# Altium PCB Medusa-AI-ESP.PcbDoc (part 2 of 2)
Units mil, origin at the board's own origin, x right, y up, seen from the top; angles counter-clockwise.
Board outline 7750 x 7750 mil, 4 copper layers (Top Layer, Layer 1, Layer 2, Bottom Layer), stack 23.756 mil thick; 124 components, 93 nets, 550 pads, 211 vias.
Unrouted connection lines stored in the file: 1.
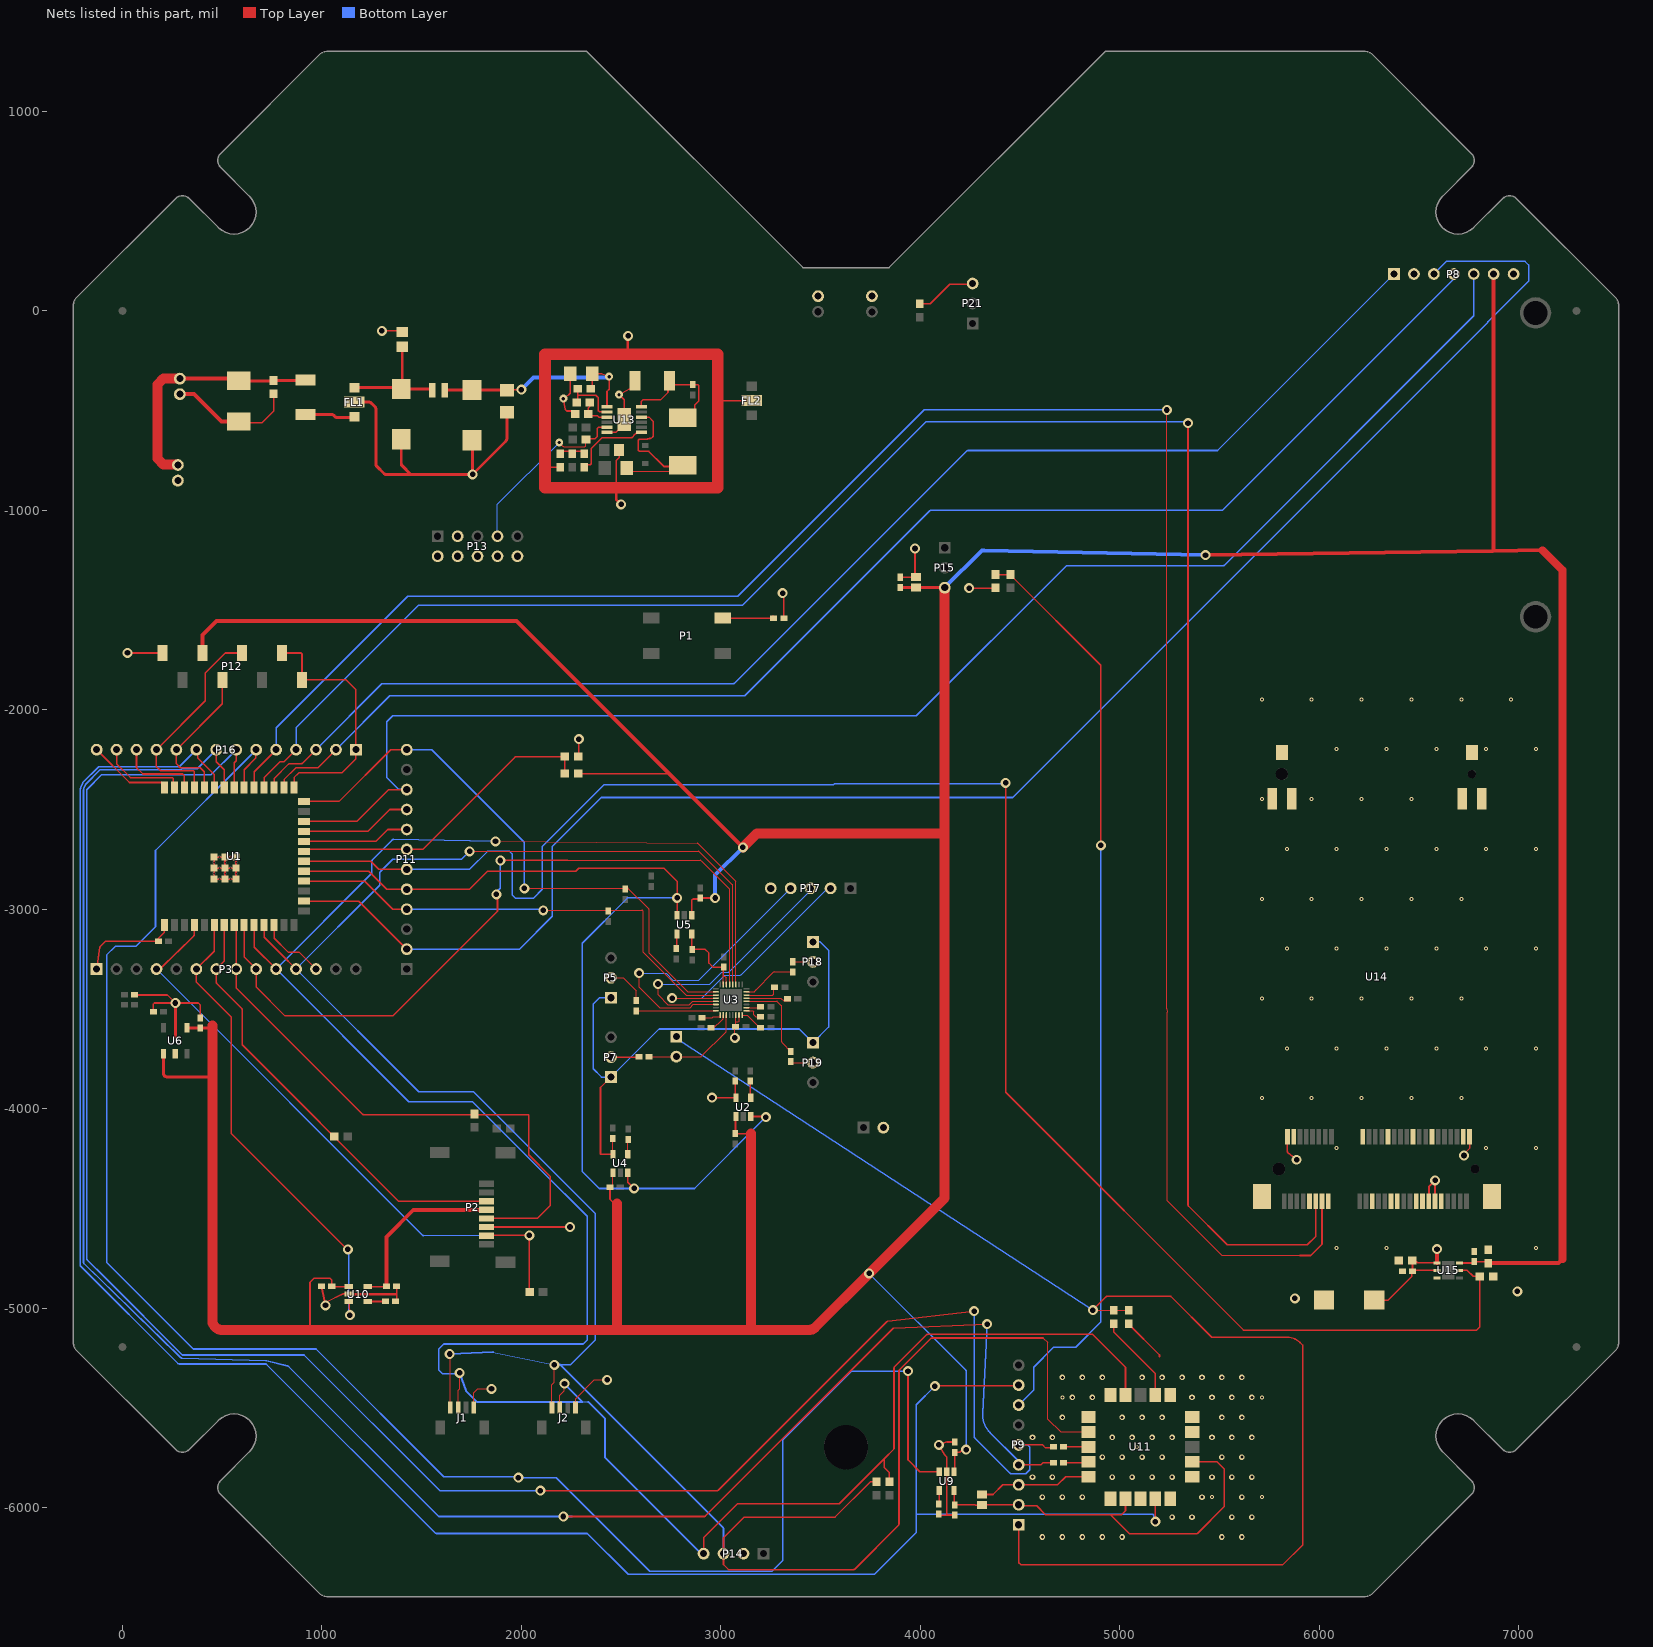
[diagram p4: the nets of this part, all layers, seen from the top]

## Via types
v1: diameter 50, hole 28, Top Layer to Bottom Layer, 64 vias
v2: diameter 28, hole 15, Top Layer to Bottom Layer, tented both sides, 61 vias
v3: diameter 20, hole 10, Top Layer to Bottom Layer, tented both sides, 59 vias
v4: diameter 50, hole 28, Top Layer to Bottom Layer, tented both sides, 16 vias
v5: diameter 40, hole 16, Top Layer to Bottom Layer, tented both sides, 5 vias
v6: diameter 19.68, hole 7.87, Top Layer to Bottom Layer, 4 vias
v7: diameter 38, hole 16, Top Layer to Bottom Layer, tented both sides, 2 vias

## Nets (pads, with @x,y where several pads share a name; then routed paths per layer and width w, separated by ;. In a path a pad name is that pad's centre, name@x,y a point inside that pad or via, vN(x,y) a via of type N, cw(c..) or ccw(c..) an arc to the next point about the centre after c; other vN are vias at no path point) (continued)
DGND: C1.2 C2.1 C3.2 C21.1 C22.2 C25.2 C26.2 C27.2 C28.2 C29.1 C30.1 C31.1 C34.1 C35.2 C38.1 C39.1 C40.2 C41.2 C42.1 C43.1 C44.1 C46.1 C47.2 C48.1 C49.2 C50.2 D2.2 D3.A FL1.2_4 FL2.2_4 J1.1 J2.1 P2.6 P3.1 P4.2 P6.2 P8.7 P9.3 P12.1 P13.2 P13.3 P13.4 P13.6 P13.8 P13.10 P14.2 P16.14 P21.3 P24.2 P25.2 P33.2 R2.1 R4.1 R7.1 R14.1 R16.2 R20.2 R22.1 U1.1 U1.40 U1.41_1 U1.41_2 U1.41_3 U1.41_4 U1.41_5 U1.41_6 U1.41_7 U1.41_8 U1.41_9 U6.2 U9.2 U10.2 U11.1 U11.4 U11.5 U11.6 U11.10 U11.11 U11.15 U11.16 U11.20 U13.6 U13.13 U14.4 U14.9 U14.15 U14.18 U14.21 U14.26 U14.27 U14.29 U14.34 U14.35 U14.37 U14.40 U14.43 U14.50 U14.53 U14.54 U14.S1_1 U14.S1_2 U14.S1_3 U14.S2_1 U14.S2_2 U14.S2_3 U15.3 | length 9985.4
  Top Layer w6: J1.1@1761.5,-5498.94 1761.5,-5423.5 1780,-5405 v1(1850,-5405) ; J2.1@2271.26,-5498.94 2271.26,-5453.74 2365,-5360 v1(2430,-5360)
  Top Layer w8: P3.1@-130,-3300 -113.57,-3190.78 ; P16.14@-130,-2200 34.47,-2364.47 196.28,-2364.47 196.28,-2365 205,-2373.72 205,-2385 U1.40@210,-2390 ; -113.56,-3190.75 cw(c-105.65,-3191.97) -111.32,-3186.32 -87.34,-3162.34 cw(c-81.69,-3168) -81.69,-3160 165.69,-3160 C1.2@179.41,-3160 179.41,-3146.35 207.69,-3118.08 ccw(c202,-3112.45) 210,-3112.45 U1.1@210,-3078.98 ; v1(25,-1715) P12.1@200,-1715 ; C35.2@60.59,-3430 225,-3430 v1(265,-3470) ; C21.1@154.41,-3515 154.41,-3475.59 160,-3470 v1(265,-3470) ; C22.2@390,-3544.41 390,-3479.69 380.31,-3470 v1(265,-3470) ; U1.41_3@510,-2738.43 486.38,-2738.43 U1.41_9@458.82,-2738.43 458.82,-2765.98 U1.41_8@458.82,-2793.54 ; D2.2@555,-560 700,-560 757.44,-502.56 C42.1@757.44,-416.1 ; C27.2@997.72,-4891.1 999.92,-4900.88 ccw(c1007.92,-4900.88) 1000.07,-4902.45 v1(1017.44,-4986.1) v1@1022.57,-4971.42 ; v1@1022.59,-4971.39 cw(c1030.13,-4974.06) 1026.64,-4966.86 1099.99,-4931.52 cw(c1119.43,-4971.73) 1116.52,-4927.16 U10.2@1134.17,-4929.57 ; v1(1300,-100) 1397.2,-100 C43.1@1402.44,-105.24 ; 1368.62,-4929.57 1373.31,-4924.88 ; C30.1@1368.9,-4966.1 1371.55,-4963.45 ccw(c1365.9,-4957.79) 1373.9,-4957.79 1373.9,-4943.68 ; 1373.9,-4929.57 1373.9,-4943.68 ; C28.2@1373.9,-4891.1 1373.9,-4943.68 ; C41.2@1752.44,-648.62 C41.2@1755,-651.18 ; P2.6@1825.51,-4593.5 v1(2243.5,-4593.5) ; 2097.91,-785 2099.45,-783.46 2117.91,-783.46 R14.1@2195,-783.46 ; C39.1@2244.88,-320 2244.88,-412.67 2239.23,-418.32 cw(c2233.59,-412.65) 2238.34,-419.09 v5(2210,-440) 2219.44,-492.44 ccw(c2227.31,-491) 2221.63,-496.63 2226.95,-501.95 2253.29,-501.95 R7.1@2268.98,-517.64 ; R2.1@2285,-2235 2287.64,-2219.31 v1(2287.64,-2146.69) ; U13.6@2429,-609 2474.5,-609 2515,-568.5 U13.13@2515,-545 2515,-445 v5(2490,-420) D3.A@2541.66,-391.59 ; 2475,-865.88 2475,-750 2489.84,-735.16 C46.1@2489.84,-697.64 C46.1@2475,-712.48 ; 2530,-222.68 2532.5,-220.18 ; v1@2532.5,-127.5 v1(2535,-125) ; 2964.06,-445 2969.06,-450 2984.06,-450 FL2.2_4@3155,-450 ; v1(3310,-1415) 3315.59,-1420.59 R20.2@3315.59,-1540 ; C3.2@3898.31,-1335.51 3977.4,-1335.51 C2.1@3978.31,-1334.6 3973.31,-1329.6 v1(3973.31,-1191.1) ; C38.1@3997.44,35.83 4050.24,35.83 4148.31,133.9 P21.3@4268.31,133.9 ; C29.1@4092.44,-6033.07 4097.44,-6038.07 C26.2@4172.44,-6038.07 4170.47,-6036.1 4137.13,-6036.1 4132.44,-6031.42 U9.2@4132.44,-5820.24 4132.44,-5746.25 4124.38,-5738.18 ; 4124.35,-5738.16 cw(c4130.03,-5732.53) 4123.13,-5736.57 v4(4093.31,-5686.1) 4133.62,-5671.1 4171.65,-5671.1 C25.2@4172.44,-5671.89 ; v1(4245,-1390) 4375.59,-1390 R4.1@4376.69,-1388.9 R4.1@4371.69,-1383.9 ; C31.1@4308.31,-5934.6 4364.81,-5934.6 4413.31,-5886.1 P9.3@4493.31,-5886.1 4688.31,-5886.1 4728.9,-5845.51 U11.15@4843.62,-5845.51 ; R22.1@5045,-5078.46 5045,-5080.43 5199.57,-5235 5199.57,-5244.57 ; U14.S1_2@5744.39,-2426.48 U14.S1_2@5764.02,-2446.1 ; C48.1@6398.98,-4761.1 6400.95,-4761.1 C48.1@6416.85,-4777.01 ; C49.2@6416.85,-4816.1 6417.66,-4816.1 C49.2@6427.44,-4825.88 ; U14.35@6486.46,-4463.82 U14.35@6489.45,-4466.81 ; U14.S2_3@6815.2,-2446.1 6827.44,-2433.86 U14.S2_3@6822.44,-2428.86 ; C34.1@6839.57,-4715.51 C34.1@6847.44,-4707.64 ; U14.54@6866.38,-4457.91 U14.54@6866.38,-4440.2 ; R16.2@6872.43,-4840.69 R16.2@6872.85,-4841.1 ; U1.41_8@458.82,-2793.54 486.38,-2793.54 U1.41_1@513.94,-2793.54 ; U1.41_8@458.82,-2793.54 458.82,-2821.1 U1.41_7@458.82,-2848.66 486.38,-2848.66 U1.41_2@513.94,-2848.66 ; U1.41_2@513.94,-2848.66 513.94,-2821.1 U1.41_1@513.94,-2793.54 ; U1.41_2@513.94,-2848.66 541.5,-2848.66 U1.41_4@569.06,-2848.66 569.06,-2821.1 U1.41_5@569.06,-2793.54 ; U1.41_1@513.94,-2793.54 541.5,-2793.54 U1.41_5@569.06,-2793.54 ; U1.41_1@513.94,-2793.54 513.94,-2765.98 U1.41_3@513.94,-2738.43 541.5,-2738.43 U1.41_6@569.06,-2738.43 569.06,-2765.98 U1.41_5@569.06,-2793.54
  Top Layer w12: U10.2@1139.17,-4929.57 1368.62,-4929.57 ; 2475,-865.88 2475,-886.61 2475,-945 v1(2500,-970) ; 2532.5,-220.18 2532.5,-217.32 v1@2532.5,-127.5
  Top Layer w15: 265,-3640 v1(265,-3470) ; FL1.2_4@1162.44,-457.64 1236.42,-457.64 cw(c1236.42,-472.64) 1246.99,-461.99 1265.62,-480.62 cw(c1255,-491.21) 1270,-491.16 1270,-491.21 1270,-768.79 ccw(c1285,-768.79) 1274.38,-779.38 1310.61,-815.61 1310.64,-815.64 ccw(c1321.21,-805) 1321.21,-820 1444.88,-820 ; C40.2@1397.44,-643.62 1397.44,-766.35 ccw(c1412.44,-766.35) 1401.83,-776.95 1444.88,-820 ; C41.2@1755,-651.18 v1(1755,-820) ; C44.1@1927.44,-507.76 1927.44,-636.85 cw(c1912.44,-636.8) 1926.62,-641.68 1924.24,-648.62 cw(c1910.05,-643.73) 1920.67,-654.33 v1(1755,-820) ; 1444.88,-820 v1(1755,-820)
  Top Layer w20: P25.2@287.44,-417.64 357.64,-417.64 495,-555 D2.2@582.44,-555
  other v1: 5878.31,-4951.1 6993.31,-4916.1
  other v2: 4612.44,-6147.64 4712.44,-6147.64 4812.44,-6147.64 4912.44,-6147.64 5012.44,-6147.64 5512.44,-6147.64 5612.44,-6147.64 5262.44,-6047.64 5362.44,-6047.64 5562.44,-6047.64 5662.44,-6047.64 4612.44,-5947.64 4712.44,-5947.64 4812.44,-5947.64 5412.44,-5947.64 5612.44,-5947.64 4562.44,-5847.64 4662.44,-5847.64 4962.44,-5847.64 5062.44,-5847.64 5162.44,-5847.64 5262.44,-5847.64 5462.44,-5847.64 5562.44,-5847.64 5662.44,-5847.64 4912.44,-5747.64 5012.44,-5747.64 5112.44,-5747.64 5212.44,-5747.64 5512.44,-5747.64 5612.44,-5747.64 4562.44,-5647.64 4662.44,-5647.64 4962.44,-5647.64 5062.44,-5647.64 5162.44,-5647.64 5262.44,-5647.64 5462.44,-5647.64 5562.44,-5647.64 5662.44,-5647.64 4712.44,-5547.64 5012.44,-5547.64 5112.44,-5547.64 5212.44,-5547.64 5512.44,-5547.64 5612.44,-5547.64 4762.44,-5447.64 4862.44,-5447.64 5362.44,-5447.64 5462.44,-5447.64 5562.44,-5447.64 5662.44,-5447.64 4712.44,-5347.64 4812.44,-5347.64 4912.44,-5347.64 5112.44,-5347.64 5212.44,-5347.64 5312.44,-5347.64 5412.44,-5347.64 5512.44,-5347.64 5612.44,-5347.64
  other v3: 5462.44,-5947.64 5712.44,-5947.64 5087.44,-5697.64 4712.44,-5447.64 5712.44,-5447.64 6087.44,-4697.64 6337.44,-4697.64 7087.44,-4697.64 6087.44,-4197.64 6837.44,-4197.64 7087.44,-4197.64 5712.44,-3947.64 5962.44,-3947.64 6212.44,-3947.64 6462.44,-3947.64 6712.44,-3947.64 5837.44,-3697.64 6087.44,-3697.64 6337.44,-3697.64 6587.44,-3697.64 6837.44,-3697.64 7087.44,-3697.64 5712.44,-3447.64 5962.44,-3447.64 6212.44,-3447.64 6462.44,-3447.64 6712.44,-3447.64 5837.44,-3197.64 6087.44,-3197.64 6337.44,-3197.64 6587.44,-3197.64 6837.44,-3197.64 7087.44,-3197.64 5712.44,-2947.64 5962.44,-2947.64 6212.44,-2947.64 6462.44,-2947.64 6712.44,-2947.64 5837.44,-2697.64 6087.44,-2697.64 6337.44,-2697.64 6587.44,-2697.64 6837.44,-2697.64 7087.44,-2697.64 5712.44,-2447.64 5962.44,-2447.64 6212.44,-2447.64 6462.44,-2447.64 6087.44,-2197.64 6337.44,-2197.64 6587.44,-2197.64 6837.44,-2197.64 7087.44,-2197.64 5712.44,-1947.64 5962.44,-1947.64 6212.44,-1947.64 6462.44,-1947.64 6712.44,-1947.64 6962.44,-1947.64
ES7210_12: P17.2 U3.12 | length 1240.5
  Top Layer w6: v1(2756.06,-3446.06) U3.12@2974.87,-3446.06
  Bottom Layer w6: v1(2756.06,-3446.06) 2903.94,-3446.06 3020,-3330 3097.51,-3330 ccw(c3097.51,-3324) 3101.74,-3328.26 3533.26,-2896.74 cw(c3537.49,-2901) 3537.49,-2895 P17.2@3550,-2895
ES7210_13: P17.3 U3.13 | length 1341.5
  Top Layer w6: v1(2685,-3375) 2685,-3430 2734.06,-3479.06 2841.14,-3479.06 2858.39,-3461.81 U3.13@2974.87,-3461.81
  Bottom Layer w6: v1(2685,-3375) 2945,-3375 3005,-3315 3037.51,-3315 ccw(c3037.51,-3309) 3041.74,-3313.26 3448.27,-2906.73 ccw(c3444,-2902.51) 3450,-2902.51 P17.3@3450,-2895
ES7210_14: P17.4 U3.14 | length 1473.2
  Top Layer w6: v1(2590,-3320) 2590,-3390 2693.06,-3493.06 2846.94,-3493.06 2862.44,-3477.56 U3.14@2974.87,-3477.56
  Bottom Layer w6: v1(2590,-3320) 2595,-3315 2600,-3320 2725,-3320 2760,-3355 2890,-3355 P17.4@3350,-2895
FAULT: P13.7 R8.2 U13.5 | length 915
  Top Layer w6: v7(2190,-659.88) 2190,-660 2208.24,-678.24 ccw(c2212.49,-674) 2212.49,-680 2317.5,-680 ccw(c2317.46,-674) 2323.46,-674 R8.2@2323.46,-645
  Top Layer w8: R8.2@2333.46,-640 2370,-640 2380,-630 2380,-590 2386.6,-583.4 U13.5@2429,-583.4
  Bottom Layer w6: P13.7@1880,-1130 1880,-969.88 v7(2190,-659.88)
GPIO0: P12.7 P12.8 P16.1 U1.27 | length 1267.1
  Top Layer w8: P12.7@800,-1715 895,-1715 900,-1720 P12.8@900,-1850 1120,-1850 1170,-1900 P16.1@1170,-2200 1170,-2245 1100,-2315 885,-2315 860,-2340 U1.27@860,-2390
GPS_EN: P16.6 U1.32 U9.3 | length 9211
  Top Layer w8: U1.32@610,-2390 610,-2300 668.47,-2241.53 668.47,-2201.53 P16.6@670,-2200 ; v1(3938.31,-5316.1) 3938.34,-5757.82 ccw(c3946.34,-5757.82) 3940.65,-5763.45 3997.44,-5820.24 U9.3@4095.04,-5820.24
  Bottom Layer w8: P16.6@670,-2200 165,-2705 165,-3087.89 67.89,-3185 -35,-3185 -80,-3230 -80,-4766.69 ccw(c-72,-4766.69) -77.66,-4772.34 355,-5205 970,-5205 1610,-5845 1980,-5845 v1(1985,-5850) 2175,-5850 2644,-6319 3256,-6319 3310,-6265 3310,-5660 3653.9,-5316.1 v1(3938.31,-5316.1)
GPS_PIN: P9.8 P16.9 U1.35 U11.19 | length 10746.7
  Top Layer w8: P16.9@370,-2200 376.53,-2206.53 376.53,-2241.53 460,-2325 U1.35@460,-2390 ; v4(4073.31,-5391.1) 4075.81,-5388.6 4490.81,-5388.6 P9.8@4493.31,-5386.1 ; v4(5178.31,-6071.1) 5178.31,-5955.79 U11.19@5178.27,-5955.75
  Bottom Layer w8: -198.68,-2363.69 ccw(c-192.97,-2369.28) -200.45,-2366.45 -209.42,-2390.17 ccw(c-172,-2404.31) -212,-2404.31 -212,-4784.69 ccw(c-204,-4784.69) -209.67,-4790.33 277.66,-5277.66 ccw(c283.31,-5272) 283.31,-5280 716.69,-5280 cw(c716.69,-5288) 722.34,-5282.34 1567.69,-6127.69 ccw(c1573.31,-6122) 1573.26,-6130 2330,-6130 2535,-6335 3770,-6335 3980,-6125 3980,-6034.1 ; -198.66,-2363.66 -120,-2285 285,-2285 P16.9@370,-2200 ; v4(4073.31,-5391.1) 3980,-5484.41 3980,-6034.1 ; v4(5178.31,-6071.1) 5171.31,-6064.1 5171.31,-6042.1 ccw(c5163.31,-6042.1) 5163.31,-6034.1 3980,-6034.1
GPS_RST: U11.18 | length 0.2
  Top Layer w8: U11.18@5103.31,-5955.91 U11.18@5103.46,-5955.75
HYDRO_EN: P11.5 U1.19 U2.3 U4.3 U5.3 | length 5139.9
  Top Layer w8: U1.19@909.21,-2809.49 1234.49,-2809.49 1325,-2900 P11.5@1425,-2900 1740,-2900 1830,-2810 2272.5,-2810 2287.5,-2795 2715,-2795 2780.77,-2860.77 v4(2780.77,-2943.17) 2780.77,-3027.85 U5.3@2779.24,-3029.39 ; U4.3@2533.37,-4322.13 2533.37,-4368.46 v4(2564.95,-4400.04) ; U2.3@3149.99,-4039.3 3217.93,-4039.3 cw(c3217.93,-4047.3) 3222.03,-4040.43 3223.74,-4041.45 ccw(c3227.84,-4034.58) v4(3225.54,-4042.24)
  Bottom Layer w8: v4@2785.77,-2943.17 v4(2780.77,-2943.17) 2531.83,-2943.17 2305,-3170 2305,-4315 2390.04,-4400.04 v4(2564.95,-4400.04) 2867.74,-4400.04 v4(3225.54,-4042.24)
I2SDIN: P3.12 U1.12 | length 340.2
  Top Layer w8: U1.12@760,-3078.98 760,-3145 830,-3215 885,-3215 P3.12@970,-3300
I2SDOUT: C20.1 P11.4 U1.18 U3.11 | length 2420.5
  Top Layer w6: v1@2110,-3005 2604,-3005 cw(c2604,-3011) 2610,-3011 2610,-3215 2825.31,-3430.31 U3.11@2974.87,-3430.31
  Top Layer w8: U1.18@909.21,-2859.49 1214.49,-2859.49 1355,-3000 P11.4@1425,-3000
  Bottom Layer w8: P11.4@1425,-3000 v1@2110,-3000
  other v1: 2109.41,-3005.59
IN_3: C53.2 U3.31 | length 275.1
  Top Layer w6: U3.31@3128.41,-3414.57 3165.07,-3414.57 ccw(c3165.04,-3408.57) 3170.63,-3410.75 cw(c3184.52,-3416.11) 3173.91,-3405.66 3263.26,-3316.31 cw(c3267.49,-3320.57) 3267.49,-3314.57 C53.2@3361.64,-3314.53 C53.2@3361.64,-3314.53
IN_4: C54.2 U3.28 | length 433.1
  Top Layer w6: U3.28@3128.41,-3461.81 3279.33,-3461.81 cw(c3279.33,-3467.81) 3283.54,-3463.54 3303.24,-3483.24 cw(c3299,-3487.49) 3305,-3487.49 3305,-3664.22 ccw(c3311,-3664.22) 3306.74,-3668.45 ; 3306.76,-3668.47 C54.2@3351.64,-3713.35
IN_L: C17.2 U3.16 | length 408.8
  Top Layer w6: C17.2@2566.05,-3509.05 U3.16@2974.87,-3509.05
IN_R: C19.2 P10.2 U3.19 | length 521.3
  Top Layer w6: C19.2@2640.54,-3740.04 2641.64,-3738.94 P10.2@2776.64,-3738.94 2898.58,-3738.94 ccw(c2898.58,-3732.94) 2902.8,-3737.2 3026.29,-3613.71 ccw(c3022.02,-3609.5) 3028.02,-3609.5 ; 3028.02,-3609.5 U3.19@3028.02,-3530.71
IO1: P16.13 U1.39 | length 433.3
  Top Layer w8: P16.13@-30,-2200 -30,-2270 40,-2340 250.31,-2340 255,-2344.69 255,-2385 U1.39@260,-2390
IO2: P16.12 U1.38 | length 406.6
  Top Layer w8: P16.12@70,-2200 70,-2290 102,-2322 302,-2322 310,-2330 U1.38@310,-2390
IO14: P11.8 U1.22 | length 540.4
  Top Layer w8: U1.22@909.21,-2659.49 1270.51,-2659.49 1330,-2600 P11.8@1425,-2600
IO23: P11.9 U1.23 | length 561.1
  Top Layer w8: U1.23@909.21,-2609.49 1230.51,-2609.49 1340,-2500 P11.9@1425,-2500
IR_SLEEP: P8.5 P11.10 U1.24 | length 7488.6
  Top Layer w8: U1.24@909.21,-2559.49 1175.51,-2559.49 1335,-2400 P11.10@1425,-2400
  Bottom Layer w8: P11.10@1425,-2400 1423.47,-2398.47 1383.47,-2398.47 1325,-2340 1325,-2060 1355,-2030 3976.69,-2030 ccw(c3976.69,-2022) 3982.33,-2027.67 4732.67,-1277.33 5519.36,-1277.33 ccw(c5519.36,-1269.33) 5525,-1275 6772.69,-27.31 ccw(c6767,-21.69) 6775,-21.69 P8.5@6775,185
LRCLK: C18.1 P11.12 U1.26 U3.10 | length 2934.7
  Top Layer w6: v1@2020,-2895 2532.51,-2895 cw(c2532.51,-2901) 2536.72,-2896.72 2638.26,-2998.26 ; 2638.27,-2998.27 cw(c2634,-3002.49) 2640,-3002.49 2640,-3220 2834.57,-3414.57 U3.10@2974.87,-3414.57
  Top Layer w8: U1.26@909.21,-2459.49 1085.51,-2459.49 1345,-2200 P11.12@1425,-2200
  Bottom Layer w8: P11.12@1425,-2200 1550,-2200 2014.41,-2664.41 v1(2014.41,-2895.59)
MCLK: P3.9 U1.9 U3.5 | length 3773.3
  Top Layer w6: 2231.84,-2753.94 2896.45,-2753.94 cw(c2896.45,-2759.94) 2900.66,-2755.66 3042.03,-2897.03 cw(c3037.76,-2901.25) 3043.76,-2901.25 U3.5@3043.76,-3377.17
  Top Layer w8: U1.9@610,-3078.98 610,-3240 P3.9@670,-3300 670,-3390 815,-3535 1355,-3535 1880,-3010 v1@1880,-2925 ; v1@1895,-2753.94 2231.84,-2753.94
  Bottom Layer w8: v1(1874.41,-2925.59) 1874.41,-2914.23 1894.41,-2894.23 v1(1894.41,-2755.59)
MISO: P2.7 P3.4 R24.2 U1.4 | length 3238
  Top Layer w8: P3.4@170,-3300 183.33,-3300.16 ccw(c183.42,-3292.16) 188.99,-3297.9 357.12,-3133.76 ccw(c351.52,-3128.05) 357.68,-3133.15 ccw(c349.87,-3126.7) 360,-3126.7 U1.4@360,-3078.98 ; P2.7@1825.51,-4636.81 1858.91,-4635 v1(2040,-4635) R24.2@2040,-4925
  Bottom Layer w8: P3.4@170,-3300 1504.46,-4634.46 ; 1504.48,-4634.48 ccw(c1510.11,-4628.8) 1510.17,-4636.8 v1(2040,-4635)
MOSI: P2.3 P3.7 R19.2 U1.7 | length 2220.5
  Top Layer w8: U1.7@510,-3078.98 510,-3260 P3.7@470,-3300 470,-3366.69 ccw(c478,-3366.69) 472.33,-3372.33 597.66,-3497.66 cw(c592,-3503.31) 600,-3503.31 600,-3676.69 ccw(c608,-3676.69) 602.34,-3682.34 1383.58,-4463.58 P2.3@1825.51,-4463.58
NetAv: P8.2
NetC7_1: C7.1 U2.4 | length 83.8
  Top Layer w8: C7.1@3148.27,-3861.3 3148.27,-3927.35 U2.4@3149.8,-3945
NetC11_2: C11.2 U3.30 | length 185.2
  Top Layer w6: U3.30@3128.41,-3430.31 3258.69,-3430.31 ccw(c3258.69,-3424.31) 3264.69,-3424.31 3264.69,-3400.78 C11.2@3280,-3385
NetC12_1: C12.1 U4.4 | length 75.1
  Top Layer w6: U4.4@2533.37,-4227.64 2533.37,-4157.4 C12.1@2536.83,-4153.94
NetC13_2: C13.2 U3.29 | length 226.8
  Top Layer w6: U3.29@3128.41,-3446.06 3301.06,-3446.06 3315,-3460 C13.2@3349.41,-3460
NetC16_1: C16.1 U5.4 | length 75.1
  Top Layer w8: C16.1@2775.77,-3197.58 2779.24,-3194.11 U5.4@2779.24,-3123.88
NetC17_1: C17.1 P5.2 | length 206.3
  Top Layer w6: P5.2@2446.64,-3343.94 2511.64,-3343.94 2576.64,-3408.94 C17.1@2576.64,-3458.35
NetC19_1: C19.1 P7.2 | length 138.7
  Top Layer w8: P7.2@2449.08,-3741.57 C19.1@2587.82,-3741.57
NetC23_2: C23.2 U3.26 | length 72.4
  Top Layer w6: U3.26@3128.41,-3493.31 3196.1,-3493.31 C23.2@3199.41,-3490
NetC24_2: C24.2 U3.25 | length 92.6
  Top Layer w6: U3.25@3128.41,-3509.05 3159.05,-3509.05 3165,-3515 3165,-3530 3175,-3540 C24.2@3199.41,-3540
NetC29_2: C29.2 U9.4 | length 68.2
  Top Layer w8: C29.2@4092.44,-5981.89 4095.04,-5979.29 U9.4@4095.04,-5914.72
NetC30_2: C30.2 U10.4 | length 89.4
  Top Layer w8: U10.4@1228.66,-4966.97 1316.85,-4966.97 C30.2@1317.72,-4966.1
NetC32_1: C32.1 U11.14 | length 127
  Top Layer w8: C32.1@4718.9,-5776.1 4838.23,-5776.1 U11.14@4843.62,-5770.71
NetC33_1: C33.1 U11.13 | length 124.8
  Top Layer w8: C33.1@4718.9,-5696.1 4843.43,-5696.1 U11.13@4843.62,-5695.91
NetC36_1: C36.1 U3.17 | length 100.9
  Top Layer w6: C36.1@2905.59,-3545 2956.43,-3545 2962.89,-3538.54 2995.65,-3538.54 2996.52,-3537.67 U3.17@2996.52,-3530.71
NetC37_2: C37.2 U3.24 | length 119.3
  Top Layer w6: U3.24@3106.76,-3530.71 3131.18,-3530.71 3195.47,-3595 C37.2@3199.41,-3595
NetC40_1: C40.1 C43.2 FL1.3 L2.1 | length 609
  Top Layer w8: C40.1@1390.59,-384.8 C40.1@1397.44,-391.65 C40.1@1402.44,-386.65 ; L2.1@1546.46,-391.65 L2.1@1552.44,-397.64
  Top Layer w15: FL1.3@1162.44,-384.8 C40.1@1390.59,-384.8 ; C40.1@1397.44,-391.65 L2.1@1546.46,-391.65 ; C40.1@1402.44,-386.65 C43.2@1402.44,-180.04
NetC52_2: C52.2 U3.18 | length 94.1
  Top Layer w6: C52.2@2957.8,-3602.2 3011.91,-3548.09 3011.91,-3531.07 U3.18@3012.27,-3530.71
NetC53_1: C53.1 P18.2 | length 100.2
  Top Layer w6: C53.1@3361.64,-3263.35 3362.23,-3263.94 P18.2@3461.64,-3263.94
NetC54_1: C54.1 P19.2 | length 113.9
  Top Layer w6: C54.1@3351.64,-3759.53 3361.05,-3768.94 P19.2@3461.64,-3768.94
NetD1_K: D1.K FL1.1 | length 252.1
  Top Layer w8: FL1.1@1157.91,-535 FL1.1@1162.44,-530.47
  Top Layer w15: D1.K@917.44,-519.25 1048.04,-519.25 cw(c1048.04,-534.25) 1058.68,-523.68 1065.61,-530.61 ccw(c1076.21,-520) 1076.21,-535 FL1.1@1157.91,-535
NetP1_2: P1.2 R20.1 | length 260.3
  Top Layer w8: P1.2@3008.27,-1540 3250.47,-1540 3260.47,-1530 R20.1@3264.41,-1530
NetR12_1: R12.1 R13.2 R14.2 | length 120
  Top Layer w8: R14.2@2197.44,-704.17 2255,-704.17 R12.1@2317.44,-704.17
NetR23_2: R23.2 U11.7 | length 443.9
  Top Layer w8: R23.2@4970,-5078.46 4970,-5120 5178.27,-5328.27 U11.7@5178.27,-5436.06
PPS: P9.1 P10.1 R22.2 R23.1 | length 6514
  Top Layer w6: v4(4865,-5010) 4968.46,-5010 R23.1@4970,-5011.54 R22.2@5045,-5011.54
  Top Layer w8: P9.1@4493.31,-6086.1 4493.31,-6276.1 4503.31,-6286.1 5818.31,-6286.1 5918.31,-6186.1 5918.31,-5190.09 ; v4(4865,-5010) 4932.66,-4942.34 cw(c4938.31,-4948) 4938.31,-4940 5251.69,-4940 cw(c5251.69,-4948) 5257.34,-4942.34 5458.59,-5143.59 ccw(c5464.22,-5137.9) 5464.18,-5145.9 5839.81,-5145.9 cw(c5839.88,-5236.58) 5904.05,-5172.52 5915.94,-5184.4 cw(c5910.31,-5190.09) 5918.31,-5190.05
  Bottom Layer w8: P10.1@2774.95,-3648.94 P10.1@2801.96,-3664.35 ; P10.1@2801.98,-3664.36 cw(c2797.99,-3671.3) 2802.37,-3664.59 v4(4865,-5010)
RI: P8.3 P11.2 U1.16 | length 8424.3
  Top Layer w8: U1.16@909.21,-2959.49 1181.17,-2959.49 cw(c1181.17,-2967.49) 1186.8,-2961.8 1309.84,-3084.84 ; 1309.87,-3084.87 P11.2@1425,-3200
  Bottom Layer w8: P11.2@1425,-3200 1990,-3200 2155,-3035 2155,-2685 2400,-2440 4460,-2440 ccw(c4460,-2432) 4465.64,-2437.67 6843.14,-60.18 ccw(c6837.45,-54.55) 6845.22,-56.43 cw(c6853,-58.31) 6847.34,-52.66 7051.69,151.69 7051.69,225 ccw(c7043.69,225) 7049.36,230.64 7032.34,247.66 ccw(c7026.69,242) 7026.69,250 6643.31,250 ccw(c6643.31,242) 6637.66,247.66 P8.3@6575,185
RX_GPS: C33.2 P9.5 P16.7 U1.33 | length 10019.1
  Top Layer w8: U1.33@560,-2390 560,-2265 570,-2255 P16.7@570,-2200 ; v1(2095,-5915) 2981.69,-5915 ccw(c2981.69,-5907) 2987.33,-5912.67 3831.23,-5068.77 cw(c3836.87,-5074.45) 3835.93,-5066.5 v1(4270,-5015) ; P9.5@4493.31,-5686.1 4613.31,-5686.1 4628.31,-5701.1 4662.72,-5701.1 C33.2@4667.72,-5696.1
  Bottom Layer w8: -177.66,-2398.66 ccw(c-172,-2404.31) -180,-2404.31 -180,-4751.69 ccw(c-172,-4751.69) -177.67,-4757.33 -86.91,-4848.09 300,-5235 910,-5235 1590,-5915 v1(2095,-5915) ; -177.66,-2398.66 -104,-2325 445,-2325 565,-2205 570,-2205 P16.7@570,-2200 ; v1(4270,-5015) 4270.81,-5645.24 cw(c4262.81,-5645.29) 4270.81,-5645.29 ccw(c4278.81,-5645.29) 4273.14,-5650.93 4450.99,-5828.79 ccw(c4456.62,-5823.1) 4456.58,-5831.1 4528.31,-5831.1 4548.31,-5811.1 4548.31,-5696.1 4538.31,-5686.1 P9.5@4493.31,-5686.1
RX_IRIDIUM: P8.1 P16.3 U1.29 | length 6706.6
  Top Layer w8: U1.29@760,-2390 760,-2345 832.66,-2272.34 cw(c838.31,-2278) 838.31,-2270 896.69,-2270 ccw(c896.69,-2262) 902.34,-2267.66 P16.3@970,-2200
  Bottom Layer w8: P16.3@970,-2200 1300,-1870 3061.69,-1870 ccw(c3061.69,-1862) 3067.33,-1867.67 4232.67,-702.33 cw(c4238.31,-708) 4238.27,-700 5490,-700 P8.1@6375,185
RX_SWARM: P16.5 U1.31 U14.13 | length 10568.6
  Top Layer w6: v1(5236.64,-496.64) 5236.64,-3498.23 5238.28,-3516.46 cw(c5232.31,-3517) 5238.31,-3517 5238.31,-4461.97 5510.67,-4734.33 ccw(c5514.93,-4730.1) 5514.93,-4736.1 5902.44,-4736.1
  Top Layer w8: U1.31@660,-2390 660,-2310 P16.5@770,-2200 ; 5902.44,-4736.1 5957.44,-4736.1 6014.02,-4679.53 U14.13@6014.02,-4463.82 U14.13@6012.44,-4465.39
  Bottom Layer w8: P16.5@770,-2200 770,-2090 1430,-1430 3085,-1430 4020,-495 v1@5236.64,-495
RXD0: P12.4 P16.10 U1.36 | length 751.8
  Top Layer w8: U1.36@410,-2390 410,-2310 390,-2290 290,-2290 270,-2270 P16.10@270,-2200 500,-1970 P12.4@500,-1850
SCK: P2.5 P3.8 R18.2 U1.8 | length 2895.5
  Top Layer w8: U1.8@560,-3078.98 570,-3088.98 P3.8@570,-3300 570,-3391.69 ccw(c578,-3391.69) 572.32,-3397.32 1202.69,-4027.69 ccw(c1208.31,-4022) 1208.27,-4030 1765,-4030 2036.54,-4030 2036.54,-4231.54 2145,-4340 2145,-4485 2079.8,-4550.2 P2.5@1825.51,-4550.2
SCL: J1.4 J2.4 P3.11 P14.3 R15.1 U1.11 U3.4 U11.12 | length 12773.1
  Top Layer w6: v1(1640,-5230) 1643.39,-5233.39 J1.4@1643.39,-5498.94 ; v1(1740,-2710) 2887.51,-2710 cw(c2887.51,-2716) 2891.75,-2711.75 3057.75,-2877.75 cw(c3053.51,-2882) 3059.51,-2882 U3.4@3059.51,-3377.17 ; J2.4@2153.15,-5498.94 2153.15,-5383.15 2165,-5371.3 v1(2165,-5285) ; 4617.2,-5150 4638.31,-5171.1 4638.31,-5556.1 4703.31,-5621.1 U11.12@4843.62,-5621.1
  Top Layer w8: U1.11@710,-3078.98 710,-3136.69 ccw(c718,-3136.69) 712.33,-3142.33 795.12,-3225.12 ; 795.14,-3225.14 P3.11@870,-3300 ; R15.1@3780,-5871.54 3748.46,-5871.54 3572.36,-6047.64 3116.77,-6047.64 3013.31,-6151.1 P14.3@3013.31,-6231.1 3013.31,-6286.1 3038.31,-6311.1 3664.99,-6311.1 ccw(c3664.99,-6303.1) 3670.64,-6308.77 3890.99,-6088.42 ccw(c3885.31,-6082.79) 3893.31,-6082.79 3893.31,-5311.61 4052.57,-5152.34 cw(c4058.23,-5158) 4058.23,-5150 4617.2,-5150
  Bottom Layer w6: 1857.44,-5221.1 v1(2165,-5285) ; 3011.57,-6100.23 cw(c3007.31,-6104.45) 3013.31,-6104.45
  Bottom Layer w8: 1292.34,-2812.66 ccw(c1298,-2818.31) 1290,-2818.31 1290,-2876.69 cw(c1282,-2876.69) 1287.66,-2882.34 P3.11@870,-3300 1485,-3915 1756.69,-3915 cw(c1756.69,-3923) 1762.31,-3917.31 ; 1292.34,-2812.66 1355,-2750 1700,-2750 v1(1740,-2710) ; 1762.31,-3917.31 2367.67,-4522.67 cw(c2362,-4528.31) 2370,-4528.27 ; v1(2165,-5285) 2195.68,-5285 2245,-5285 2370,-5160 2370,-4528.31
  Bottom Layer w10: v1(1640,-5230) 1857.44,-5221.1 ; v1(2165,-5285) 2190.64,-5283.89 cw(c2191.07,-5293.88) 2195.68,-5285 cw(c2191.07,-5293.88) 2198.14,-5286.81 3011.55,-6100.21 ; P14.3@3013.31,-6231.1 3013.31,-6104.45
SD_EN: P3.6 U1.6 U10.3 | length 2382.7
  Top Layer w8: U1.6@460,-3078.98 460,-3210 P3.6@370,-3300 370,-3365 542.66,-3537.66 cw(c537,-3543.31) 545,-3543.31 545,-4121.69 ccw(c553,-4121.69) 547.34,-4127.34 1125,-4705 v1(1130,-4705) ; U10.3@1137.62,-4974.87 ccw(c1145.48,-4976.33) 1137.49,-4976.68 v1(1140,-5035) ; U10.3@1137.63,-4974.83 1138.99,-4967.92 U10.3@1139.17,-4966.97
  Bottom Layer w8: v1(1130,-4705) 1135,-4710 1135,-5030 v1(1140,-5035)
SDA: J1.3 J2.3 P3.10 P14.4 R5.1 U1.10 U3.3 U11.9 | length 12524.5
  Top Layer w6: J1.3@1682.76,-5498.94 1682.76,-5412.24 1690,-5405 v1(1690,-5325) ; v1(1870,-2660) 2882.56,-2670 cw(c2882.51,-2676) 2886.76,-2671.76 3075.26,-2860.26 U3.3@3075.26,-3377.17 ; J2.3@2192.52,-5498.94 2192.52,-5437.48 2215.88,-5414.12 v1(2215.88,-5379.12)
  Top Layer w8: U1.10@660,-3078.98 660,-3190 P3.10@770,-3300 ; P14.4@2913.31,-6231.1 2913.31,-6151.1 3083.31,-5981.1 3593.31,-5981.1 3819.7,-5754.7 ; R5.1@3845,-5871.54 3845,-5825 3819.7,-5799.7 3819.7,-5754.7 ; U11.9@5028.66,-5436.06 5028.66,-5296.46 4863.31,-5131.1 4738.31,-5131.1 4037.21,-5131.1 ccw(c4037.21,-5139.1) 4031.57,-5133.43 3870.62,-5294.38 ccw(c3876.31,-5300.01) 3868.31,-5299.97 3868.31,-5706.1 3819.7,-5754.7
  Bottom Layer w6: 2305.22,-5470.22 2334.89,-5470.22 ; P14.4@2901.1,-6231.1 P14.4@2913.31,-6231.1
  Bottom Layer w8: 1252.34,-2752.66 ccw(c1258,-2758.31) 1250,-2758.31 1250,-2816.69 cw(c1242,-2816.69) 1247.66,-2822.34 P3.10@770,-3300 1435,-3965 1751.69,-3965 cw(c1751.69,-3973) 1757.31,-3967.31 ; 1252.34,-2752.66 1352.66,-2652.34 ; 1352.68,-2652.32 cw(c1358.28,-2658.03) 1358.44,-2650.03 v1(1870,-2660) ; v1@1700,-5330 1691.77,-5330 1605,-5330 1585,-5310 1585,-5205 1610,-5180 2310,-5180 2330,-5160 2330,-4540 2100.01,-4310.01 1757.31,-3967.31
  Bottom Layer w10: v1(1690,-5325) 1691.77,-5330 1721.36,-5413.62 ccw(c1730.77,-5410.25) 1722.26,-5415.5 1722.34,-5415.62 ccw(c1730.85,-5410.36) 1723.75,-5417.41 ; 1723.75,-5417.42 1776.56,-5470.22 2305.22,-5470.22 2246.82,-5411.82 ; v1(2215.88,-5379.12) 2246.62,-5411.61 ; 2246.62,-5411.62 ccw(c2253.92,-5404.78) 2246.81,-5411.81 ; 2334.89,-5470.22 2420,-5555.33 2420,-5750 P14.4@2901.1,-6231.1
SENSE: L3.2 R11.1 U13.10 | length 819.5
  Top Layer w6: R11.1@2527.56,-787.64 2544.92,-805 2779.09,-805 L3.2@2810,-774.09
  Top Layer w8: U13.10@2601,-532.2 2639.57,-532.2 2660,-552.63 2660,-627 2660,-627.06 cw(c2652,-626.94) 2656.49,-633.56 2649.47,-638.33 cw(c2644.98,-631.71) 2644.98,-639.71 2641.74,-639.71 ccw(c2641.78,-647.71) 2638.59,-640.37 cw(c2628.5,-617.5) 2628.5,-642.5 2594.52,-642.5 ccw(c2594.56,-650.5) 2587.63,-646.5 cw(c2573.52,-638.65) 2586.55,-648.18 ccw(c2593,-652.91) 2585,-652.87 2585,-694.66 ccw(c2593,-694.66) 2593,-702.66 2633.09,-702.66 cw(c2633.09,-710.66) 2634.32,-702.75 cw(c2633.18,-710.67) 2635.73,-703.09 2635.83,-703.12 cw(c2633.28,-710.7) 2637.24,-703.75 2637.3,-703.79 2637.36,-703.82 cw(c2633.3,-710.72) 2638.87,-704.97 2638.92,-705.02 2708.25,-774.35 2713.9,-780 L3.2@2795,-780
SOLAR_SHDN: R7.2 R9.2 U13.3 | length 159.9
  Top Layer w8: R9.2@2343.46,-460 2343.46,-478.03 2335.91,-485.59 R7.2@2335.91,-517.64 2343.27,-525 2380,-525 2387.2,-532.2 U13.3@2429,-532.2
SOLAR_SW: C45.2 D3.K L3.1 U13.12 | length 620.7
  Top Layer w6: D3.K@2735,-356.61 D3.K@2741.61,-350 D3.K@2761.02,-369.41 ; L3.1@2815,-535.91 2826.74,-535.91 L3.1@2870,-492.65
  Top Layer w8: U13.12@2601,-481 2601,-454 2610.59,-444.41 2699.38,-444.41 2735,-408.79 D3.K@2735,-356.61 ; D3.K@2746.61,-365 2757.66,-376.04 cw(c2752,-381.7) D3.K@2760,-381.7 ; D3.K@2761.02,-369.41 C45.2@2860,-369.41 2884.41,-369.41 2890,-375 2890,-450 2870,-470 L3.1@2870,-492.65
SOLAR_VIN: C39.2 C41.1 C44.2 L2.2 R10.1 U13.1 | length 1162.2
  Top Layer w8: C41.1@1751.46,-397.64 C41.1@1752.44,-396.65 ; C44.2@1926.58,-396.65 C44.2@1927.44,-397.52 1929.96,-395 v1(2000,-395) ; R10.1@2348.46,-390 2355.12,-383.35 C39.2@2355.12,-320 ; C39.2@2355.12,-315 2399.69,-315 cw(c2399.69,-323) 2402.57,-315.54 v5(2440,-330) ; U13.1@2429,-481 2429,-404 2440,-393 v5@2440,-335
  Top Layer w15: L2.2@1615.43,-397.64 C41.1@1751.46,-397.64 ; C41.1@1752.44,-396.65 C44.2@1926.58,-396.65
  Bottom Layer w20: v1(2000,-395) 2060,-335 v5@2440,-335
SOLAR_VIN_REG: R9.1 R10.2 U13.2 | length 292.6
  Top Layer w8: R9.1@2276.54,-460 2281.54,-455 2281.54,-422.5 ; R10.2@2281.54,-390 2281.54,-422.5 ; U13.2@2429,-506.6 2391.6,-506.6 2385,-500 2385,-434.69 2380.31,-430 2380,-430 2372.5,-422.5 2281.54,-422.5
TILE_EN: P11.6 R16.1 U1.20 U15.5 | length 8948.6
  Top Layer w8: U1.20@909.21,-2759.49 1244.49,-2759.49 1285,-2800 P11.6@1425,-2800 ; v1(4428.31,-2366.1) 4428.31,-3918.31 5620,-5110 6790,-5110 6805.5,-5094.5 6805.5,-4969.16 R16.1@6805.5,-4840.69 6772.03,-4840.69 6742.44,-4811.1 U15.5@6703.94,-4811.1
  Bottom Layer w8: P11.6@1425,-2800 1740,-2800 1830,-2710 1940.31,-2710 1955,-2724.69 1955,-2930 1970,-2945 2060,-2945 2105,-2900 2105,-2685 2415,-2375 3565,-2375 3570,-2370 v1@4425,-2370
TX_GPS: C32.2 P9.4 P16.8 U1.34 | length 9765.9
  Top Layer w8: P16.8@470,-2200 470,-2260 510,-2300 U1.34@510,-2390 ; v1(2210,-6045) 2916.69,-6045 ccw(c2916.69,-6037) 2922.33,-6042.67 3862.15,-5102.85 cw(c3867.8,-5108.52) 3867.44,-5100.53 v1(4335,-5080) ; P9.4@4493.31,-5786.1 4603.31,-5786.1 4613.31,-5776.1 C32.2@4667.72,-5776.1
  Bottom Layer w8: -182.68,-2370.31 ccw(c-176.97,-2375.91) -184.29,-2372.68 -193.96,-2394.64 ccw(c-172,-2404.31) -196,-2404.31 -196,-4770.63 ccw(c-188,-4770.63) -193.58,-4776.36 288.83,-5246.46 ccw(c300,-5235) 299.5,-5250.99 717.43,-5264.01 cw(c716.69,-5288) 722.3,-5264.67 828.54,-5290.22 cw(c826.69,-5298) 832.32,-5292.32 1585,-6045 v1(2210,-6045) 2255,-6045 ; -182.66,-2370.28 -113.37,-2301 291.63,-2301 297.63,-2295 375,-2295 P16.8@470,-2200 ; v1(4335,-5080) 4313.71,-5525.82 cw(c4305.71,-5525.44) 4313.69,-5526.01 ccw(c4439.85,-5535.89) 4350.02,-5625.02 4490.98,-5765.98 cw(c4485.31,-5771.62) 4493.31,-5771.62 P9.4@4493.31,-5786.1
TX_IRIDIUM: P8.4 P16.2 U1.28 | length 6979
  Top Layer w8: U1.28@810,-2390 810,-2350 870,-2290 980,-2290 P16.2@1070,-2200
  Bottom Layer w8: P16.2@1070,-2200 1340,-1930 3116.69,-1930 ccw(c3116.69,-1922) 3122.33,-1927.67 4047.67,-1002.33 cw(c4053.31,-1008) 4053.27,-1000 5515,-1000 6675,160 P8.4@6675,185 P8.4@6675,195
TX_SWARM: P16.4 U1.30 U14.11 | length 10335.8
  Top Layer w8: U1.30@710,-2390 710,-2340 790,-2260 810,-2260 P16.4@870,-2200 ; v1@5335,-555 v1(5342.44,-562.44) 5342.44,-4482.79 ccw(c5350.44,-4482.79) 5344.77,-4488.43 5536.81,-4680.47 ccw(c5542.44,-4674.79) 5542.4,-4682.79 5940.75,-4682.79 5982.52,-4641.02 U14.11@5982.52,-4463.82
  Bottom Layer w8: P16.4@870,-2200 870,-2090 1485,-1475 3110,-1475 4030,-555 v1@5342.44,-555
TXD0: P12.5 P16.11 U1.37 | length 1077.9
  Top Layer w8: U1.37@360,-2390 360,-2310.69 355.31,-2306 191,-2306 170,-2285 P16.11@170,-2200 415,-1955 415,-1815 515,-1715 P12.5@600,-1715
V_BCKP: P9.7 R3.1 R4.2 | length 4672.2
  Top Layer w8: R4.2@4376.69,-1321.97 R3.1@4451.69,-1321.97 4451.69,-1323.94 4905,-1777.24 v1(4905,-2680)
  Bottom Layer w8: P9.7@4493.31,-5486.1 4568.31,-5411.1 4568.31,-5296.1 4668.31,-5196.1 4778.9,-5196.1 4905,-5070 v1(4905,-2680) v1@4905,-2670
VA: C5.1 C51.2 P17.5 U2.5 U3.22 U3.23 | length 355.8
  Top Layer w6: v4(3070,-3645) 3070,-3600.82 cw(c3076,-3600.82) 3070,-3600.71 C51.2@3070.26,-3590 ; C51.2@3075.26,-3580 3075.26,-3565 ; U3.22@3075.26,-3530.71 3075.26,-3565 ; U3.23@3091.01,-3530.71 3091.01,-3561.49 3087.49,-3565 3075.26,-3565
  Top Layer w8: v1(2955.57,-3945) U2.5@3075,-3945 3071.73,-3927.35 3071.73,-3875.02 C5.1@3073.27,-3861.3
VCC_GPS: C26.1 C31.2 P9.2 U9.5 U11.2 U11.17 | length 2048.8
  Top Layer w8: U9.5@4169.84,-5914.72 4169.84,-5984.29 C26.1@4172.44,-5986.89 4274.09,-5986.89 4274.81,-5987.6 C31.2@4308.31,-5987.6 4309.02,-5986.89 4309.81,-5986.1 P9.2@4493.31,-5986.1 4498.31,-5991.1 4583.31,-5991.1 4628.31,-6036.1 4953.31,-6036.1 ; U11.17@5028.66,-5955.75 5028.66,-6015.75 5008.31,-6036.1 4953.31,-6036.1 ; U11.2@5363.31,-5770.71 5487.91,-5770.71 5523.31,-5806.1 5523.31,-5996.1 5390.65,-6128.76 cw(c5384.99,-6123.1) 5384.99,-6131.1 5051.56,-6131.1 cw(c5051.62,-6123.1) 5046,-6128.8 4953.31,-6036.1
VCC_SD: C28.1 P2.4 U10.5 | length 897.7
  Top Layer w6: U10.5@1228.31,-4891.81 U10.5@1228.66,-4892.17
  Top Layer w8: U10.5@1228.66,-4892.17 1316.65,-4892.17 C28.1@1317.72,-4891.1
  Top Layer w20: C28.1@1322.72,-4891.1 1322.72,-4642.28 1458.11,-4506.89 P2.4@1825.51,-4506.89
VCC_TILE: C48.2 C49.1 C50.1 U14.2 U14.39 U14.41 U14.52 U15.1 U15.2 | length 1086.8
  Top Layer w8: U14.2@5840.79,-4140.98 5840.79,-4215.56 ccw(c5848.79,-4215.56) 5843.86,-4221.86 v4(5887.44,-4256.1) ; C50.1@6275.98,-4960 6345,-4960 6465,-4840 6465,-4819.13 C49.1@6468.03,-4816.1 ; U15.1@6585.45,-4771.69 6584.82,-4771.69 6547.44,-4771.69 6495.24,-4771.69 cw(c6495.24,-4763.69) 6489.59,-4769.35 6476.34,-4756.1 6474.37,-4756.1 6468.03,-4762.44 C49.1@6468.03,-4816.1 ; U15.2@6590.95,-4811.1 6473.03,-4811.1 C49.1@6468.03,-4816.1 ; v4@6722.44,-4231.1 6754.17,-4199.37 U14.52@6754.17,-4140.98
  Top Layer w10: U14.39@6549.45,-4463.82 6549.45,-4391.1 v4(6580.95,-4359.61) ; U14.41@6580.95,-4463.82 v4@6580.95,-4372.6
  Top Layer w20: U15.1@6590.95,-4773.7 v4(6590.95,-4704.61)
  other v4: 6725.95,-4234.61
VDDIO: C4.2 C14.1 U3.6 U3.7 U5.5 | length 445.7
  Top Layer w6: U3.7@3012.27,-3377.17 3012.27,-3335.24 3020.24,-3335.24 3028.02,-3343.02 U3.6@3028.02,-3377.17
  Top Layer w8: U5.5@2854.04,-3123.88 2854.04,-3201.66 2921.66,-3201.66 2940,-3220 2940,-3270 2960.59,-3290.59 C4.2@3015,-3290.59 3012.27,-3293.32 3012.27,-3335.24
VFB: R12.2 U13.7 | length 394.7
  Top Layer w8: R12.2@2317.44,-771.1 2342,-771.1 ccw(c2342,-763.1) 2350,-763.1 2350,-690 2405,-635 2552.27,-635 ccw(c2552.27,-627) 2559.49,-630.45 2560.32,-628.72 cw(c2589.2,-642.5) 2573.12,-614.83 2581.29,-610.08 cw(c2585.31,-617) 2585.31,-609 U13.7@2601,-609
VH: C9.1 P5.1 P7.1 P18.1 P19.1 U4.5 | length 2815
  Top Layer w6: C9.1@2456.83,-4148.94 2458.57,-4150.67 U4.5@2458.57,-4227.64
  Top Layer w8: P7.1@2449.08,-3841.57 2396.64,-3894.02 2396.64,-4227.64 U4.5@2458.57,-4227.64
  Bottom Layer w8: P5.1@2449.08,-3443.94 2391.06,-3443.94 2360,-3475 2360,-3800 2401.57,-3841.57 P7.1@2449.08,-3841.57 2690.24,-3600.41 3393.11,-3600.41 P19.1@3461.64,-3668.94 3540,-3590.57 3540,-3205 3498.94,-3163.94 P18.1@3461.64,-3163.94
VIN: C2.2 C3.1 C6.1 C10.1 C15.1 C22.1 C25.1 C27.1 C34.2 C47.1 P8.6 P12.3 P15.3 R1.2 U2.1 U4.1 U5.1 U6.1 U6.4 U9.1 U10.1 U15.6 | length 26787.8
  Top Layer w6: C10.1@2444.35,-4395.04 2447.79,-4395.04 2458.57,-4384.26 U4.1@2458.57,-4322.13
  Top Layer w8: 940,-5110 940,-4870 960,-4850 1040,-4850 1048.9,-4858.9 C27.1@1048.9,-4891.1 1049.96,-4892.17 U10.1@1134.17,-4892.17 ; R1.2@2285,-2320 2740,-2320 ; C10.1@2444.35,-4395.04 2444.35,-4454.45 2464.95,-4475.04 ; U5.1@2854.04,-3029.39 2854.04,-2956.76 cw(c2862.04,-2956.76) 2862.04,-2948.76 C15.1@2895.18,-2948.76 ; C15.1@2895.77,-2943.76 v1(2971.24,-2943.76) ; C6.1@3073.27,-4124.96 C6.1@3073.27,-4125.12 3150,-4125.12 ; C6.1@3073.27,-4124.92 cw(c3081.27,-4124.96) 3073.29,-4124.41 3073.44,-4122.24 ccw(c3065.46,-4121.63) 3073.46,-4121.63 3073.46,-4057.14 U2.1@3075,-4039.49 ; C3.1@3898.31,-1386.69 C3.1@3899.25,-1387.64 ; U9.1@4169.84,-5820.24 4172.44,-5817.64 C25.1@4172.44,-5723.07 4198.07,-5723.07 4203.11,-5718.04 4221.96,-5718.04 v1(4230,-5710) ; U15.6@6703.94,-4773.7 6770.43,-4773.7 C47.1@6777.44,-4766.69 C34.2@6839.57,-4766.69
  Top Layer w15: U6.1@205.94,-3725 205.94,-3825.05 ccw(c220.94,-3825) 220.89,-3840 450,-3840 ; U6.4@324.06,-3595.08 438.06,-3595.08 450,-3583.14 ; C3.1@3899.25,-1387.64 P15.3@4122.44,-1387.64
  Top Layer w20: P12.3@400,-1715 400,-1625 470,-1555 1975,-1555 2740,-2320 v1(3110,-2690) ; v1(5430,-1225) 6869.98,-1203.7 ; C34.2@6839.57,-4766.69 C34.2@6847.44,-4774.57 7200.41,-4774.57 7220,-4754.98 ; P8.6@6875,185 6875,-1198.68 6869.98,-1203.7 ; 7120,-1200 6869.98,-1203.7
  Top Layer w40: 7120,-1200 7220,-1300 7220,-4754.98
  Top Layer w50: 450,-3583.14 450,-3840 450,-5060 ccw(c500,-5060) 500,-5110 940,-5110 2480,-5110 ; 2480,-4475 2480,-5110 ; v1(3110,-2690) 3180,-2620 4122.44,-2620 ; 3150,-4125.12 3150,-5110 ; P15.3@4122.44,-1387.64 4122.44,-2620 ; 2480,-5110 3150,-5110 ; 3150,-5110 3439.31,-5110 ccw(c3439.29,-5060) 3474.64,-5095.36 3743.6,-4826.4 4122.44,-4447.56 4122.44,-2620
  Bottom Layer w8: v1(3743.31,-4826.1) 4227.66,-5310.45 cw(c4222,-5316.11) 4230,-5316.11 v1(4230,-5710)
  Bottom Layer w20: v1(2971.24,-2943.76) 2971.24,-2828.76 v1(3110,-2690) ; P15.3@4122.44,-1387.64 4304.04,-1206.04 cw(c4318.18,-1220.19) 4318.62,-1200.19 v1(5430,-1225)
VSENS: P11.7 R1.1 R2.2 U1.21 | length 1603.2
  Top Layer w8: U1.21@909.21,-2709.49 918.7,-2700 P11.7@1425,-2700 1505,-2700 1514.98,-2690.02 ; 1515,-2690 1967.67,-2237.33 cw(c1973.31,-2243) 1973.27,-2235 R2.2@2218.07,-2235 ; R2.2@2217.71,-2221.85 R2.2@2218.07,-2235 ; R1.1@2218.07,-2320 R2.2@2218.07,-2235
VSOLAR: C42.2 D1.A D2.1 P24.1 P25.1 | length 1247.9
  Top Layer w8: D2.1@571.69,-339.53 D2.1@582.44,-350.28 ; C42.2@756.34,-350.28 C42.2@757.44,-349.17 ; D1.A@914.29,-349.17 D1.A@917.44,-346.02
  Top Layer w15: D2.1@582.44,-350.28 C42.2@756.34,-350.28 ; C42.2@757.44,-349.17 D1.A@914.29,-349.17
  Top Layer w20: P25.1@287.44,-339.53 D2.1@571.69,-339.53
  Top Layer w50: P24.1@277.44,-772.64 275.71,-770.91 205.91,-770.91 175,-740 175,-368.82 204.29,-339.53 P25.1@287.44,-339.53
pads on no net: J1.S1 J1.S2 J2.S1 J2.S2 P1.3 P1.4 P2.0 P2.1 P2.8 P9.6 P9.9 P12.2 P15.1 P21.2 U1.41_10 U1.41_11 U1.41_12 U1.41_13 U1.41_14 U1.41_15 U1.41_16 U1.41_17 U1.41_18 U1.41_19 U1.41_20 U1.41_21 U6.3 U11.8 U13.8 U14. U14.1 U14.3 U14.5 U14.6 U14.7 U14.8 U14.10 U14.12 U14.14 U14.16 U14.17 U14.19 U14.20 U14.22 U14.23 U14.24 U14.25 U14.28 U14.30 U14.31 U14.32 U14.33 U14.36 U14.38 U14.42 U14.44 U14.45 U14.46 U14.47 U14.48 U14.49 U14.51 U15.4 U15.7
copper on no net: | length 107.1
  Top Layer w10: 3715,-4095 3820,-4095
  Bottom Layer w8: 6777.46,-4796.71 cw(c6780.15,-4804.25) 6778.14,-4796.5 cw(c6780.15,-4804.25) 6779.54,-4796.27

## Polygon pours and split planes (outlines as drawn)
DGND on Bottom Layer "DGND_L04_P003" (solid, remove dead copper, pour order 3): 5612.44,-1791.1 7147.44,-1791.1 7147.44,-4896.1 6957.44,-5086.1 6957.44,-5091.1 5617.44,-5091.1 5612.44,-5086.1
DGND on Bottom Layer "DGND_L04_P001" (solid, pour order 1): 4390,-5200 4395,-5195 5755,-5195 5755,-6200 5750,-6205 4390,-6205
DGND on Top Layer "DGND_L01_P002" (solid, remove dead copper, pour order 2): 5612.44,-1786.1 5617.44,-1791.1 7147.44,-1791.1 7147.44,-4896.1 6957.44,-5086.1 5612.44,-5086.1
DGND on Top Layer "DGND_L01_P000" (solid, pour order 0): 4395,-5200 4400,-5205 5755,-5205 5755,-6195 5745,-6205 4390,-6205
3V3 on Layer 2 (split plane): 325 vertices, not listed, extent -227.46,-6427.54 7482.34,1282.27
VCC_TILE on Layer 2 (split plane): 6947.34,-5021 5627.54,-5021 5627.54,-2111.2 6947.34,-2111.2
VA on Layer 2 (split plane): 3759.9,-4579.9 2387.11,-4579.9 2170.1,-4362.89 2170.1,-2790.1 3759.9,-2790.1
DGND on Layer 1 (split plane): 325 vertices, not listed, extent -227.46,-6427.54 7482.34,1282.27
DGND on Layer 1 (split plane): 6947.34,-5021 5627.54,-5021 5627.54,-2111.2 6947.34,-2111.2
AGND on Layer 1 (split plane): 3759.9,-4579.9 2387.11,-4579.9 2170.1,-4362.89 2170.1,-2790.1 3759.9,-2790.1

## Other copper
Layer 1 (plane layer: these items are gaps in the copper):
  lines w10: 2165,-4365 2385,-4585 3765,-4585 3765,-2785 2165,-2785 2165,-4365 ; 5622.44,-5026.1 6952.44,-5026.1 6952.44,-2106.1 5622.44,-2106.1 5622.44,-5026.1
Layer 2 (plane layer: these items are gaps in the copper):
  lines w10: 2165,-4365 2385,-4585 3765,-4585 3765,-2785 3535,-2785 2165,-2785 2165,-4365 ; 5622.44,-5026.1 6952.44,-5026.1 6952.44,-2106.1 5622.44,-2106.1 5622.44,-5026.1

## Silkscreen, mask and mechanical layers (free items; w line width, h text height)
Top Overlay:
  drawing of 34 lines, arcs and shapes, not listed
  text "Medusa-AI v4.0" at 1043.31,1011.12 h200
  text "loggerhead.com" at 1043.31,771.08 h160
  text "medusa@loggerhead.com" at 1043.46,529.11 h160
  text "4V2" at 6855,360 h60 r270
  text "Slp" at 6755.66,340 h60 r270
  text "Rx" at 6355,330 h60 r270
  text "Tx" at 6655,330 h60 r270
  text "RI" at 6550,315 h60 r270
  text "G" at 6965.67,310 h60 r270
  text "Iridium" at 6005,166.02 h100
  text "+-" at 3341.66,-60 h100 r90
  text "+-" at 3681.66,-60 h100 r90
  text "+   -" at 4172.44,-97.64 h60 r90
  text "+ -" at -80,-265 h100 r270
  text "Solar" at 52.44,-282.64 h60 r270
  text "Battery" at 3435,-382.42 h200
  text "+ -" at -80,-690 h100 r270
  text "Solar" at 62.44,-712.64 h60 r270
  text "OFF" at 4057.78,-925 h200 r90
  text "3V3" at 1586.78,-1041.1 h60 r90
  text "GND" at 1691.78,-1046.1 h60 r90
  text "4V2" at 2002.44,-1046.1 h60 r90
  text "CHG" at 1764.33,-1050 h60 r90
  text "FAULT" at 1869.33,-1055 h60 r90
  text "SOLAR" at 572.44,-1108.88 h200
  text "SWARM" at 6200,-1723.89 h100
  text "ON" at 4057.78,-1830 h200 r90
  text "G" at 3685,-2730.67 h60 r180
  text "12" at 3580,-2735 h60 r180
  text "VA" at 3274.94,-2740 h60 r180
  text "14" at 3380,-2740 h60 r180
  text "13" at 3480,-2740.67 h60 r180
  text "+" at 3600.91,-3134.96 h60 r180
  text "CH 3" at 3665,-3165 h60 r270
  text "LEFT" at 2080,-3245 h60 r270
  text "S" at 3560.92,-3254.96 h60 r270
  text "-" at 2294.07,-3265.04 h60 r90
  text "-" at 3555.93,-3354.96 h60 r270
  text "S" at 2289.08,-3365.04 h60 r90
  text "+" at 2249.09,-3485.04 h60
  text "RIGHT" at 2095,-3605 h60 r270
  text "+" at 3605.91,-3634.96 h60 r180
  text "-" at 2294.08,-3665.04 h60 r90
  text "CH 4" at 3665,-3670 h60 r270
  text "S" at 3565.92,-3754.96 h60 r270
  text "S" at 2289.08,-3765.04 h60 r90
  text "-" at 3560.93,-3854.96 h60 r270
  text "+" at 2249.08,-3880.04 h60
  text "PPS" at 2830,-3985 h100 r90
  text "D" at 2925,-6335 h60 r180
  text "C" at 3035,-6335.67 h60 r180
  text "G" at 3130,-6335.67 h60 r180
  text "3V3" at 3270,-6335.67 h60 r180
Mechanical 1:
  drawing of 168 lines, arcs and shapes, not listed
Mechanical 13:
  lines w10: 4393.31,-6196.1 5753.31,-6196.1 5753.31,-5201.1 4393.31,-5201.1 4393.31,-6196.1

## Text inside footprints (layer, text, board x,y; h text height)
C2: Top Overlay "+" at 3993.31,-1411.1 h19.68 r270
C31: Top Overlay "+" at 4323.31,-6011.1 h19.68 r270
P13: Bottom Overlay "10" at 2040,-1210 h50 r180; Bottom Overlay "9" at 2040,-1110 h50 r180; Bottom Overlay "1" at 1500,-1110 h50 r180; Bottom Overlay "2" at 1480,-1210 h50 r180
U1: Mechanical 13 "ANTENNA" at 43.07,-2911.65 h50 r90